# EAGLE board CT_schematic (EAGLE 7.6.0)

Size 100 x 80 mm. Coordinates in mm from the lower left corner, seen from the top.
Outline: 0,0 100,0 100,80 0,80 0,0
Copper layers (1*16): Top 0.035mm / dielectric 1.5mm / Bottom 0.035mm
Design rules "default": minimum track width 10mil, minimum drill 24mil, track to track 8mil, track to pad 8mil, pad to pad 8mil, via to via 8mil, smd to smd 8mil, copper to edge 40mil, drill to drill 8mil, minimum pad ring 10mil, minimum via ring 8mil, stop-mask expansion 4mil, vias tented up to drill 0mil, thermal gap 10mil

## Footprints (pad centres in the part's own frame; a part is rotated, then mirrored left to right if it is on the bottom)
C0603 = smd 0.8 x 0.8: 1 -0.762,0; 2 0.762,0
C0402 = smd 0.5 x 0.5: 1 -0.508,0; 2 0.508,0
C0805 = smd 1.2 x 1.3: 1 -1.016,0; 2 1.016,0
C1210 = smd 1.2 x 2.5: 1 -1.524,0; 2 1.524,0
C1206 = smd 1.3 x 1.6: 1 -1.524,0; 2 1.524,0
L0603 = smd 0.8 x 0.8: 1 -0.762,0; 2 0.762,0
DR1040 = smd 1.6 x 3.2: 1 -4.458,0; 2 4.458,0
R0603 = smd 0.8 x 0.8: 1 -0.762,0; 2 0.762,0
LQFP100 = smd 0.3 x 1.2: 1 -6,-7.75; 2 -5.5,-7.75; 3 -5,-7.75; 4 -4.5,-7.75; 5 -4,-7.75; 6 -3.5,-7.75; 7 -3,-7.75; 8 -2.5,-7.75; 9 -2,-7.75; 10 -1.5,-7.75; 11 -1,-7.75; 12 -0.5,-7.75; 13 0,-7.75; 14 0.5,-7.75; 15 1,-7.75; 16 1.5,-7.75; 17 2,-7.75; 18 2.5,-7.75; 19 3,-7.75; 20 3.5,-7.75; 21 4,-7.75; 22 4.5,-7.75; 23 5,-7.75; 24 5.5,-7.75; 25 6,-7.75; 51 6,7.75; 52 5.5,7.75; 53 5,7.75; 54 4.5,7.75; 55 4,7.75; 56 3.5,7.75; 57 3,7.75; 58 2.5,7.75; 59 2,7.75; 60 1.5,7.75; 61 1,7.75; 62 0.5,7.75; 63 0,7.75; 64 -0.5,7.75; 65 -1,7.75; 66 -1.5,7.75; 67 -2,7.75; 68 -2.5,7.75; 69 -3,7.75; 70 -3.5,7.75; 71 -4,7.75; 72 -4.5,7.75; 73 -5,7.75; 74 -5.5,7.75; 75 -6,7.75 | smd 1.2 x 0.3: 26 7.75,-6; 27 7.75,-5.5; 28 7.75,-5; 29 7.75,-4.5; 30 7.75,-4; 31 7.75,-3.5; 32 7.75,-3; 33 7.75,-2.5; 34 7.75,-2; 35 7.75,-1.5; 36 7.75,-1; 37 7.75,-0.5; 38 7.75,0; 39 7.75,0.5; 40 7.75,1; 41 7.75,1.5; 42 7.75,2; 43 7.75,2.5; 44 7.75,3; 45 7.75,3.5; 46 7.75,4; 47 7.75,4.5; 48 7.75,5; 49 7.75,5.5; 50 7.75,6; 76 -7.75,6; 77 -7.75,5.5; 78 -7.75,5; 79 -7.75,4.5; 80 -7.75,4; 81 -7.75,3.5; 82 -7.75,3; 83 -7.75,2.5; 84 -7.75,2; 85 -7.75,1.5; 86 -7.75,1; 87 -7.75,0.5; 88 -7.75,0; 89 -7.75,-0.5; 90 -7.75,-1; 91 -7.75,-1.5; 92 -7.75,-2; 93 -7.75,-2.5; 94 -7.75,-3; 95 -7.75,-3.5; 96 -7.75,-4; 97 -7.75,-4.5; 98 -7.75,-5; 99 -7.75,-5.5; 100 -7.75,-6
SOIC-8 = smd 1.6 x 0.6: 1 -2.7,1.905 | smd 1.55 x 0.6: 2 -2.7,0.635; 3 -2.7,-0.635; 4 -2.7,-1.905; 5 2.7,-1.905; 6 2.7,-0.635; 7 2.7,0.635; 8 2.7,1.905
RFM75-S = smd 0.85 x 1.6: 1 1.7,0.8; 2 2.97,0.8; 3 4.24,0.8; 4 5.51,0.8; 5 6.78,0.8; 6 8.05,0.8; 7 9.32,0.8; 8 10.59,0.8
FCI_10118193-0001LF = smd 0.4 x 1.35: 1 -1.3,2.675; 2 -0.65,2.675; 3 0,2.675; 4 0.65,2.675; 5 1.3,2.675 | smd 1.6 x 1.4: 6 -3.2,2.45; 7 3.2,2.45 | smd 1.9 x 1.9: 8 -1.2,0; 9 1.2,0 | hole 0.5: -3.3,0; 3.3,0
SOT143B = smd 1 x 0.7: 1 -0.75,-1 | smd 0.6 x 0.7: 2 0.95,-1; 3 0.95,1; 4 -0.95,1
ABS07-32.768KHZ-7-T = smd 1.1 x 2.4: 1 -2.5,0; 2 0,0
ASDMB-XX.XXXXMHZ-XX-XX-XXX = smd 0.65 x 0.85: 1 0.45,0.2; 2 2.05,0.2; 3 2.05,1.8; 4 0.45,1.8
TSOT-23-5 = smd 1.3 x 0.62: 1 -1.31,0.95; 2 -1.31,0; 3 -1.31,-0.95; 4 1.31,-0.95; 5 1.31,0.95
WSON-8 = smd 0.3 x 0.6: 1 -0.75,0; 2 0.05,0; 3 0.85,0; 4 1.65,0; 5 1.65,3.8; 6 0.85,3.8; 7 0.05,3.8; 8 -0.75,3.8 | smd 3 x 2.6: PAD 0.45,1.9
DFN8_2X3MC = smd 0.813 x 0.305: 1 -1.398,0.75; 2 -1.398,0.25; 3 -1.398,-0.25; 4 -1.398,-0.75; 5 1.398,-0.75; 6 1.398,-0.25; 7 1.398,0.25; 8 1.398,0.75 | smd 1.753 x 1.549: 9 0,0
JST-2-SMD = smd 1 x 4.6: 1 -1,-3.7; 2 1,-3.7 | smd 1.6 x 3.4: NC1 -3.4,1.5; NC2 3.4,1.5
SON-6 = smd 0.55 x 0.3: 1 -0.355,0.5 | smd 0.52 x 0.3: 2 -0.37,0; 3 -0.37,-0.5; 4 0.37,-0.5; 5 0.37,0; 6 0.37,0.5
RUT0012A = smd 0.7 x 0.2: 1 -0.7,0.8; 2 -0.7,0.4; 3 -0.7,0; 4 -0.7,-0.4; 5 -0.7,-0.8; 7 0.7,-0.8; 8 0.7,-0.4; 9 0.7,0; 10 0.7,0.4; 11 0.7,0.8 | smd 0.2 x 0.7: 6 0,-0.85; 12 0,0.85
SW_4-1437565-2 = smd 1.4 x 2.1: 1 -2.23,4.55; 2 -2.23,-4.55; 3 2.23,4.55; 4 2.23,-4.55
LGM67K-G1J2-24-Z = smd 0.8 x 1.4: A -2,0; C 0,0
NC7SZ125M5X = smd 1.3 x 0.7: 1 -1.3,0.95; 2 -1.3,0; 3 -1.3,-0.95; 4 1.3,-0.95; 5 1.3,0.95

## Placement (x,y rotation side)
C1  1e-06  [C0603]  -19.05,66.04 0 top  (outside the outline)
C2  1e-07  [C0603]  -22.86,66.04 0 top  (outside the outline)
C3  1e-07  [C0603]  -26.67,66.04 0 top  (outside the outline)
C4  1e-07  [C0603]  -30.48,66.04 0 top  (outside the outline)
C5  1e-07  [C0603]  -34.29,66.04 0 top  (outside the outline)
C6  4.7e-06  [C0603]  -15.24,66.04 0 top  (outside the outline)
C7  1e-07  [C0603]  -38.1,66.04 0 top  (outside the outline)
C8  1e-07  [C0603]  -41.91,66.04 0 top  (outside the outline)
C9  1e-07  [C0603]  -45.72,66.04 0 top  (outside the outline)
C10  1e-08  [C0603]  -49.53,66.04 0 top  (outside the outline)
C11  1e-06  [C0603]  -53.34,66.04 0 top  (outside the outline)
C12  1e-11  [C0402]  -30.48,71.12 0 top  (outside the outline)
C13  1e-11  [C0402]  -34.29,71.12 0 top  (outside the outline)
C14  1e-08  [C0402]  -38.1,71.12 0 top  (outside the outline)
C15  1e-07  [C0402]  -41.91,71.12 0 top  (outside the outline)
C16  1e-06  [C0603]  -57.15,66.04 0 top  (outside the outline)
C17  1e-08  [C0402]  -45.72,71.12 0 top  (outside the outline)
C18  1e-05  [C0805]  -15.24,55.88 0 top  (outside the outline)
C19  1e-05  [C0805]  -20.32,55.88 0 top  (outside the outline)
C20  1e-06  [C0603]  -60.96,66.04 0 top  (outside the outline)
C21  1e-05  [C1210]  -48.26,48.26 0 top  (outside the outline)
C22  1e-07  [C0402]  -49.53,71.12 0 top  (outside the outline)
C23  1e-05  [C1206]  -54.61,48.26 0 top  (outside the outline)
C24  1e-05  [C1206]  -60.96,48.26 0 top  (outside the outline)
C25  1e-08  [C0402]  -53.34,71.12 0 top  (outside the outline)
C26  1e-07  [C0402]  -57.15,71.12 0 top  (outside the outline)
C27  1e-08  [C0402]  -60.96,71.12 0 top  (outside the outline)
C28  1e-07  [C0402]  -64.77,71.12 0 top  (outside the outline)
C29  1e-08  [C0402]  -68.58,71.12 0 top  (outside the outline)
F1  240.0  [L0603]  -64.77,66.04 0 top  (outside the outline)
I1  5.2e-06  [DR1040]  -38.1,29.21 0 top  (outside the outline)
R2  1000.0  [R0603]  -68.58,66.04 0 top  (outside the outline)
R4  4700.0  [R0603]  -15.24,71.12 0 top  (outside the outline)
R5  2200.0  [R0603]  -19.05,71.12 0 top  (outside the outline)
R6  2200.0  [R0603]  -22.86,71.12 0 top  (outside the outline)
R7  10000.0  [R0603]  -68.58,55.88 0 top  (outside the outline)
R8  10000.0  [R0603]  -15.24,60.96 0 top  (outside the outline)
R9  10000.0  [R0603]  -20.32,60.96 0 top  (outside the outline)
R10  10000.0  [R0603]  -25.4,60.96 0 top  (outside the outline)
R11  10000.0  [R0603]  -30.48,60.96 0 top  (outside the outline)
R12  10000.0  [R0603]  -35.56,60.96 0 top  (outside the outline)
R13  10000.0  [R0603]  -40.64,60.96 0 top  (outside the outline)
R14  490000.0  [R0603]  -38.1,55.88 0 top  (outside the outline)
R15  1000000.0  [R0603]  -33.02,55.88 0 top  (outside the outline)
R16  100000.0  [R0603]  -43.18,55.88 0 top  (outside the outline)
R17  91000.0  [R0603]  -45.72,60.96 0 top  (outside the outline)
R18  100000.0  [R0603]  -48.26,55.88 0 top  (outside the outline)
R19  10000.0  [R0603]  -50.8,60.96 0 top  (outside the outline)
R20  10000.0  [R0603]  -55.88,60.96 0 top  (outside the outline)
R21  82000.0  [R0603]  -60.96,60.96 0 top  (outside the outline)
R22  300000.0  [R0603]  -53.34,55.88 0 top  (outside the outline)
R23  120000.0  [R0603]  -58.42,55.88 0 top  (outside the outline)
R24  2000.0  [R0603]  -26.67,71.12 0 top  (outside the outline)
R25  10000.0  [R0603]  -66.04,60.96 0 top  (outside the outline)
R26  200000.0  [R0603]  -63.5,55.88 0 top  (outside the outline)
U1  stm32f078vbt6  [LQFP100]  -43.18,8.89 0 top  (outside the outline)
U2  24AA1025T-I/SN  [SOIC-8]  -22.86,40.64 0 top  (outside the outline)
U3  RFM75-S  [RFM75-S]  -26.67,3.81 0 top  (outside the outline)
U4  10118193-0001LF  [FCI_10118193-0001LF]  -50.8,39.37 0 top  (outside the outline)
U5  prtr5v0u2ax  [SOT143B]  -24.13,76.2 0 top  (outside the outline)
U6  ABS07-32.768KHZ-7-T  [ABS07-32.768KHZ-7-T]  -27.94,49.53 0 top  (outside the outline)
U7  ASDMB-25.000MHZ-EC-T  [ASDMB-XX.XXXXMHZ-XX-XX-XXX]  -30.48,1.27 0 top  (outside the outline)
U8  ltc3406es5  [TSOT-23-5]  -25.4,54.61 0 top  (outside the outline)
U9  LP2951ACSDX/NOPB  [WSON-8]  -43.18,38.1 0 top  (outside the outline)
U10  MCP73831T-2ACI/MC  [DFN8_2X3MC]  -49.53,74.93 0 top  (outside the outline)
U11  S2B-PH-SM4-TB(LF)(SN)  [JST-2-SMD]  -53.34,30.48 0 top  (outside the outline)
U12  TPS3895ADRYR  [SON-6]  -43.18,74.93 0 top  (outside the outline)
U13  LSF0204DRUTR  [RUT0012A]  -38.1,76.2 0 top  (outside the outline)
U14  4-1437565-2  [SW_4-1437565-2]  -27.94,29.21 0 top  (outside the outline)
U15  Q65110A2395  [LGM67K-G1J2-24-Z]  -36.83,48.26 0 top  (outside the outline)
U16  nc7sz125m5x  [NC7SZ125M5X]  -66.04,46.99 0 top  (outside the outline)

## Library data of the parts
C1-C29 F1 I1 R2 R4-R26 U1-U16 = circuit_tree

## Nets
CLK_CRYSTAL_U1_8: C12.1 U1.8 U6.1
CLK_CRYSTAL_U1_9: C13.1 U1.9 U6.2
CLK_U1_12: U1.12 U7.3
GND: C1.2 C2.2 C3.2 C4.2 C5.2 C6.2 C7.2 C8.2 C9.2 C10.2 C11.2 C12.2 C13.2 C14.2 C15.2 C16.2 C17.2 C18.2 C19.1 C19.2 C20.2 C21.2 C22.2 C23.2 C24.2 C25.2 C26.2 C27.2 C28.2 C29.2 R2.2 R7.2 R8.2 R11.2 R14.2 R18.2 R21.2 R23.2 R24.2 U1.20 U1.27 U1.49 U1.74 U1.99 U2.4 U3.1 U4.5 U4.6 U4.7 U4.8 U4.9 U5.1 U7.2 U8.2 U9.3 U9.4 U9.PAD U10.6 U10.9 U11.2 U12.2 U13.6 U15.C U16.1 U16.3
INPUT_USBPOWER_5V: C23.1 R25.2 U4.1 U5.4 U10.1 U10.2
NET_U1_14: R4.1 U1.14 U16.4
NET_U1_21: C10.1 C11.1 F1.1 U1.21
NET_U1_37: R8.1 U1.37
NET_U1_92: R5.1 U1.92 U2.6
NET_U1_93: R6.1 U1.93 U2.5
NET_U1_94: R7.1 U1.94
NET_U1_97: U15.A
NET_U1_98: U14.3 U14.4
NET_U2_1: R10.1 U2.1
NET_U2_2: R11.1 U2.2
NET_U2_3: R9.1 U2.3
NET_U3_3: R12.1 U3.3
NET_U8_1: U8.1
NET_U8_3: I1.1 U8.3
NET_U8_5: R14.1 R15.1 U8.5
NET_U8_ATNET_3: I1.2 R15.2
NET_U9_5: R16.1 U9.5
NET_U9_7: R17.2 R18.1 U9.7
NET_U10_5: R25.1 U10.5
NET_U10_8: R24.1 U10.8
NET_U12_1: R20.1 R21.1 U12.1
NET_U12_3: R22.2 R23.1 U12.3
NET_U12_4: R19.1 U12.4 U16.2
NET_U13_12: R26.1 U13.12
NET_U14_1: R2.1 U14.1 U14.2
PROC_SPI1_MISO_TOIOBUF: U13.3
PROC_SPI1_MISO_TOXCVR: U3.7 U13.9
PROC_SPI1_MOSI_TOIOBUF: U13.2
PROC_SPI1_MOSI_TOXCVR: U3.6 U13.10
PROC_SPI1_NSS_TOIOBUF: U13.5
PROC_SPI1_NSS_TOXCVR: R13.1 U3.4 U13.7
PROC_SPI1_SCK_TOIOBUF: U13.4
PROC_SPI1_SCK_TOXCVR: U3.5 U13.8
PROC_USB_DM: U1.70 U4.2 U5.3
PROC_USB_DP: U1.71 U4.3 U5.2
VCC_S1_3V7: C18.1 C20.1 C24.1 U8.4 U9.8 U10.3 U10.4 U11.1
VCC_TIER1_1V8: C1.1 C2.1 C3.1 C4.1 C5.1 C6.1 C7.1 C8.1 C9.1 C14.1 C17.1 C19.2 C22.1 C27.1 C28.1 C29.1 F1.2 I1.2 R4.2 R5.2 R6.2 R9.2 R10.2 R15.2 R19.2 R20.2 R22.1 R26.2 U1.6 U1.28 U1.50 U1.75 U1.100 U2.7 U2.8 U7.4 U12.6 U13.1 U16.5
VCC_TIER1_2V5: C15.1 C16.1 C21.1 C25.1 C26.1 R12.2 R13.2 R16.2 R17.1 U3.2 U9.1 U13.11

## Tracks (layer width: path | path; a pad name or v marks a point on that pad's centre or on a via)
CLK_CRYSTAL_U1_8  (2 unrouted)
CLK_CRYSTAL_U1_9  (2 unrouted)
CLK_U1_12  (1 unrouted)
GND  (64 unrouted)
INPUT_USBPOWER_5V  (5 unrouted)
NET_U1_14  (2 unrouted)
NET_U1_21  (3 unrouted)
NET_U1_37  (1 unrouted)
NET_U1_92  (2 unrouted)
NET_U1_93  (2 unrouted)
NET_U1_94  (1 unrouted)
NET_U1_98  (1 unrouted)
NET_U2_1  (1 unrouted)
NET_U2_2  (1 unrouted)
NET_U2_3  (1 unrouted)
NET_U3_3  (1 unrouted)
NET_U8_3  (1 unrouted)
NET_U8_5  (2 unrouted)
NET_U8_ATNET_3  (1 unrouted)
NET_U9_5  (1 unrouted)
NET_U9_7  (2 unrouted)
NET_U10_5  (1 unrouted)
NET_U10_8  (1 unrouted)
NET_U12_1  (2 unrouted)
NET_U12_3  (2 unrouted)
NET_U12_4  (2 unrouted)
NET_U13_12  (1 unrouted)
NET_U14_1  (2 unrouted)
PROC_SPI1_MISO_TOXCVR  (1 unrouted)
PROC_SPI1_MOSI_TOXCVR  (1 unrouted)
PROC_SPI1_NSS_TOXCVR  (2 unrouted)
PROC_SPI1_SCK_TOXCVR  (1 unrouted)
PROC_USB_DM  (2 unrouted)
PROC_USB_DP  (2 unrouted)
VCC_S1_3V7  (7 unrouted)
VCC_TIER1_1V8  (38 unrouted)
VCC_TIER1_2V5  (11 unrouted)